# Altium PCB flatsat_2_PCB.PcbDoc (part 5 of 6)
Units mil, origin at the board's own origin, x right, y up, seen from the top; angles counter-clockwise.
Board outline 15748.03 x 9842.52 mil, 4 copper layers (Top Layer, FlatSat GND, FlatSat VCC, Bottom Layer), stack 82.765 mil thick; 155 components, 191 nets, 1391 pads, 1634 vias.
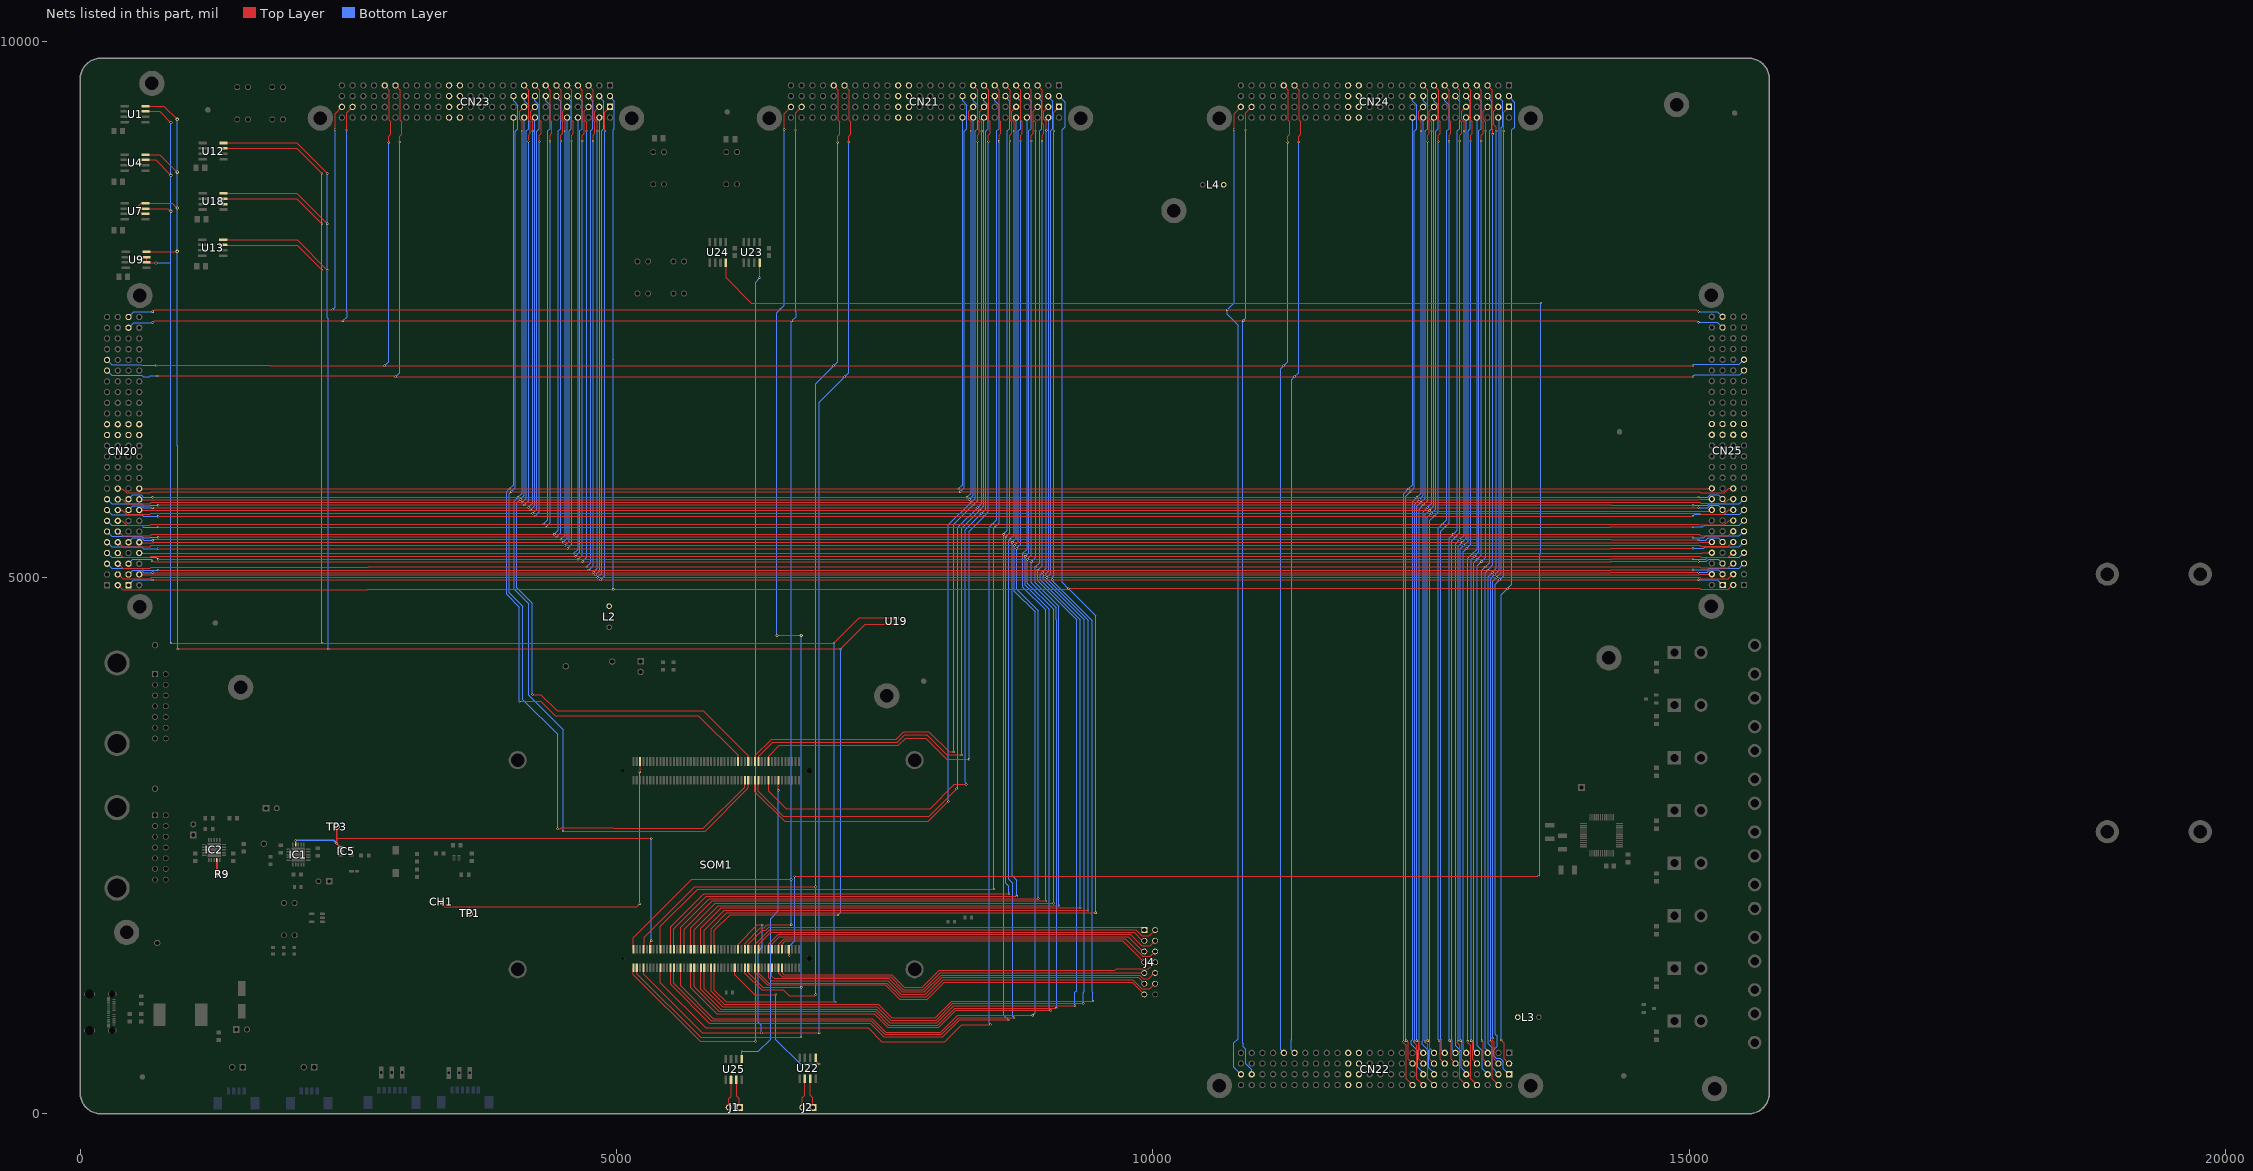
[diagram p6: the nets of this part, all layers, seen from the top]

## Via types
v1: diameter 20, hole 11.81, Top Layer to Bottom Layer, tented both sides, 872 vias
v2: diameter 30, hole 15, Top Layer to Bottom Layer, 690 vias
v3: diameter 30, hole 17.72, Top Layer to Bottom Layer, tented both sides, 72 vias

## Nets (pads, with @x,y where several pads share a name; then routed paths per layer and width w, separated by ;. In a path a pad name is that pad's centre, name@x,y a point inside that pad or via, vN(x,y) a via of type N, cw(c..) or ccw(c..) an arc to the next point about the centre after c; other vN are vias at no path point) (continued)
P32: CN20.72 CN21.72 CN22.72 CN23.72 CN24.72 CN25.72 SOM1.JX1-63 | length 35053.7
  Top Layer w8: CN20.72@551.18,5829.13 554.25,5826.07 v1(4001.13,5826.07) v1(8186.96,5826.07) v1(12381.45,5826.07) 15206,5826.07 CN25.72@15211.23,5831.3 ; v1(4094.49,3846.46) 4295.58,3846.46 4427.96,3714.08 5764.27,3714.08 6133.86,3344.49 SOM1.JX1-63@6133.86,3285.43 ; v1(12336.29,673.63) 12336.11,673.45 12336.11,664.13 12362.12,638.12 12362.12,328.88 CN22.72@12421.59,269.42
  Bottom Layer w8: CN23.72@4040.5,9287.84 4040.5,5865.44 v1(4001.13,5826.07) 3976.38,5801.31 3976.38,4842.52 4094.49,4724.41 v1(4094.49,3846.46) ; v1(8186.96,5826.07) 8226.33,5865.44 CN21.72@8226.33,9287.84 ; v1(12336.29,673.63) 12337.04,674.38 12337.04,5781.66 v1(12381.45,5826.07) 12420.82,5865.44 CN24.72@12420.82,9287.84
P33: CN20.20 CN21.20 CN22.20 CN23.20 CN24.20 CN25.20 SOM1.JX1-68 | length 36984.3
  Top Layer w8: CN20.20@351.18,5829.13 393.86,5829.13 434.39,5788.6 653.68,5788.6 664.58,5799.49 v1(4018.02,5799.49) v1(8203.85,5799.49) v1(12398.34,5799.49) 15099.99,5799.49 15108.72,5790.76 15328.02,5790.76 15368.55,5831.3 CN25.20@15411.23,5831.3 ; v1@4451.74,2660.01 4474.97,2660.01 4483.52,2668.56 4970.38,2668.56 4977.38,2661.55 5811.16,2661.55 6196.85,3047.24 SOM1.JX1-68@6196.85,3112.2 ; v1(12361.83,682.41) 12367.91,682.41 12381.05,669.27 12381.05,549.03 12381.1,548.98 12381.1,511.81 12421.59,471.33 CN22.20@12421.59,469.42
  Top Layer w15: v1(4450.79,2659.05) v1@4451.74,2660.01
  Bottom Layer w8: CN23.20@4040.16,9488.19 4040.16,9445.51 4080.69,9404.98 4080.69,9185.69 4057.39,9162.38 4057.39,5838.86 v1(4018.02,5799.49) 3999.9,5781.37 3999.9,4858.37 4127.26,4731 4127.26,3860.93 4450.79,3537.4 v1(4450.79,2659.05) ; v1(8203.85,5799.49) 8243.22,5838.86 8243.22,9162.38 8266.52,9185.69 8266.52,9404.98 8225.98,9445.51 CN21.20@8225.98,9488.19 ; v1(12361.83,682.41) 12359.54,684.7 12359.54,692.52 12358.97,693.09 12358.97,1417.32 12358.97,5760.12 v1(12398.34,5799.49) 12437.71,5838.86 12437.71,9162.38 12461.01,9185.69 12461.01,9404.98 12420.47,9445.51 CN24.20@12420.47,9488.19
P34: CN20.69 CN21.69 CN22.69 CN23.69 CN24.69 CN25.69 SOM1.JX1-70 | length 36685.2
  Top Layer w8: v1(676.34,5748.58) v1(4081.34,5748.58) v1(8267.17,5748.58) v1(12461.65,5748.58) 15083.91,5748.58 v1(15086.07,5750.74) ; v1(4120.71,9163.03) 4120.71,9249.18 4098.82,9271.07 4098.82,9347.83 CN23.69@4139.17,9388.19 ; v1(4501.97,2637.05) 5826.02,2637.05 6228.34,3039.37 SOM1.JX1-70@6228.34,3112.2 ; v1(8306.54,9163.03) 8306.54,9249.18 8284.65,9271.07 8284.65,9347.83 CN21.69@8325,9388.19 ; v1(12501.02,9163.03) 12501.02,9249.18 12479.13,9271.07 12479.13,9347.83 CN24.69@12519.49,9388.19
  Bottom Layer w8: CN20.69@451.18,5730.12 491.54,5770.47 568.3,5770.47 590.19,5748.58 v1(676.34,5748.58) ; v1(4120.71,9163.03) 4120.71,5787.95 v1(4081.34,5748.58) 4045.6,5712.84 4045.6,4891.41 4181.1,4755.91 4181.1,3901.03 4501.97,3580.16 v1(4501.97,2637.05) ; v1(8267.17,5748.58) 8306.54,5787.95 v1(8306.54,9163.03) ; v1(12501.02,9163.03) 12501.02,5787.95 v1(12461.65,5748.58) 12422.28,5709.21 12422.28,1417.32 12422.28,694.43 12410.5,682.65 12410.5,649.9 12470.47,589.93 12470.47,433.07 12521.59,381.96 CN22.69@12521.59,369.42 ; v1(15086.07,5750.74) 15172.21,5750.74 15194.11,5772.63 15270.87,5772.63 CN25.69@15311.23,5732.28
P35: CN20.70 CN21.70 CN22.70 CN23.70 CN24.70 CN25.70 SOM1.JX1-69 | length 35111.9
  Top Layer w8: CN20.70@551.18,5729.13 552.74,5727.57 v1(4102.35,5727.57) v1(8288.17,5727.57) v1(12482.66,5727.57) 14267.85,5727.57 14269.91,5725.51 15090.55,5725.51 15097.38,5732.34 15210.18,5732.34 CN25.70@15211.23,5731.3 ; CN23.70@4140.16,9288.19 CN23.70@4141.72,9286.63 ; v1(4216.54,3909.45) 4294.83,3909.45 4446.19,3758.09 5808.84,3758.09 6228.35,3338.58 SOM1.JX1-69@6228.35,3285.43 ; CN21.70@8325.98,9288.19 CN21.70@8327.54,9286.63 ; v1(12434.42,676.86) 12436.11,675.17 12436.11,664.13 12462.12,638.12 12462.12,328.88 CN22.70@12521.59,269.42 ; CN24.70@12520.47,9288.19 CN24.70@12522.03,9286.63
  Bottom Layer w8: CN23.70@4140.16,9288.19 4141.72,9286.63 4141.72,5766.94 v1(4102.35,5727.57) 4070.13,5695.35 4070.13,4906.25 4216.54,4759.84 v1(4216.54,3909.45) ; v1(8288.17,5727.57) 8327.54,5766.94 8327.54,9286.63 CN21.70@8325.98,9288.19 ; v1(12434.42,676.86) 12436.71,679.16 12436.71,687.64 12439.84,690.77 12439.84,5684.75 v1(12482.66,5727.57) 12522.03,5766.94 12522.03,9286.63 CN24.70@12520.47,9288.19
P36: CN20.18 CN21.18 CN22.18 CN23.18 CN24.18 CN25.18 SOM1.JX1-74 | length 36847
  Top Layer w8: CN20.18@351.18,5729.13 393.86,5729.13 434.39,5688.6 653.68,5688.6 667.22,5702.13 v1(4119.36,5702.13) v1(8305.19,5702.13) v1(12499.68,5702.13) 15097.36,5702.13 15108.72,5690.76 15328.02,5690.76 15368.55,5731.3 CN25.18@15411.23,5731.3 ; SOM1.JX1-74@6291.34,3112.2 6291.34,3003.94 6568.9,2726.38 7907.48,2726.38 v1(8094.49,2913.39) ; v1(12460.85,682.41) 12461.01,682.25 12467.91,682.25 12478.44,671.72 12478.44,514.47 12521.59,471.33 CN22.18@12521.59,469.42
  Bottom Layer w8: v1(4119.36,5702.13) 4158.73,5741.5 4158.73,9163.73 4180.69,9185.69 4180.69,9404.98 4140.16,9445.51 CN23.18@4140.16,9488.19 ; v1(8094.49,2913.39) 8094.49,5491.43 v1(8305.19,5702.13) 8344.56,5741.5 8344.56,9163.73 8366.52,9185.69 8366.52,9404.98 8325.98,9445.51 CN21.18@8325.98,9488.19 ; v1(12460.85,682.41) 12460.31,682.95 12460.31,1417.32 12460.31,5662.76 v1(12499.68,5702.13) 12539.05,5741.5 12539.05,9163.73 12561.01,9185.69 12561.01,9404.98 12520.47,9445.51 CN24.18@12520.47,9488.19
P37: CN20.67 CN21.67 CN22.67 CN23.67 CN24.67 CN25.67 SOM1.JX1-76 | length 36452.9
  Top Layer w8: v1(676.59,5650.14) 678.88,5652.44 686.69,5652.44 687.27,5653.02 v1(4179.78,5653.02) v1(8365.61,5653.02) v1(12560.09,5653.02) 12563.34,5653.02 12567.5,5648.86 15075.14,5648.86 15076.28,5650.01 15083.53,5650.01 v1(15085.82,5652.3) ; v1(4219.15,9162.78) 4219.15,9250.74 4198.82,9271.07 4198.82,9346.85 CN23.67@4240.16,9388.19 ; SOM1.JX1-76@6322.83,3112.2 6322.83,3007.88 6555.12,2775.59 7914.08,2775.59 v1(8169.98,3031.5) ; v1(8404.98,9162.78) 8404.98,9250.74 8384.65,9271.07 8384.65,9346.85 CN21.67@8425.98,9388.19 ; v1(12599.46,9162.78) 12599.46,9250.74 12579.13,9271.07 12579.13,9346.85 CN24.67@12620.47,9388.19
  Bottom Layer w8: CN20.67@451.18,5629.13 492.52,5670.47 568.3,5670.47 588.63,5650.14 v1(676.59,5650.14) ; v1(4179.78,5653.02) 4219.15,5692.39 v1(4219.15,9162.78) ; v1(8169.98,3031.5) 8181.1,3042.62 8181.1,5468.52 v1(8365.61,5653.02) 8404.98,5692.39 v1(8404.98,9162.78) ; v1(12599.46,9162.78) 12599.46,5692.39 v1(12560.09,5653.02) 12521.18,5614.1 12521.18,688.22 12510.5,677.55 12510.5,649.9 12573.35,587.06 12573.35,431.15 12621.59,382.91 CN22.67@12621.59,369.42 ; v1(15085.82,5652.3) 15173.77,5652.3 15194.11,5672.63 15269.89,5672.63 CN25.67@15311.23,5631.3
P38: CN20.68 CN21.68 CN22.68 CN23.68 CN24.68 CN25.68 SOM1.JX1-75 | length 35561.8
  Top Layer w8: CN20.68@551.18,5629.13 v1(4200.79,5629.13) v1(8386.61,5629.13) 8387.25,5628.49 12580.46,5628.49 v1(12581.1,5627.85) 12584.01,5627.85 12591.79,5620.08 15181.01,5620.08 15182.46,5621.53 15201.46,5621.53 CN25.68@15211.23,5631.3 ; SOM1.JX1-75@6322.83,3285.43 6324.87,3287.47 6324.87,3332.75 6456.69,3464.57 7618.11,3464.57 7687.01,3533.46 7893.7,3533.46 8080.71,3346.46 v1(8218.5,3346.46) ; v1(12536.88,674.27) 12562.12,649.03 12562.12,328.88 CN22.68@12621.59,269.42
  Bottom Layer w8: v1(4200.79,5629.13) 4240.16,5668.5 CN23.68@4240.16,9288.19 ; v1(8218.5,3346.46) 8218.5,5461.02 v1(8386.61,5629.13) 8425.98,5668.5 CN21.68@8425.98,9288.19 ; v1(12536.88,674.27) 12536.88,679.32 12541.73,684.17 12541.73,1417.32 12541.73,5589.76 12579.82,5627.85 v1(12581.1,5627.85) ; v1@12581.1,5629.13 12620.47,5668.5 CN24.68@12620.47,9288.19
P39: CN20.16 CN21.16 CN22.16 CN23.16 CN24.16 CN25.16 SOM1.JX1-82 | length 36776.2
  Top Layer w8: CN20.16@351.18,5629.13 393.86,5629.13 434.39,5588.6 653.68,5588.6 664.58,5599.49 v1(4217.45,5599.49) v1(8403.28,5599.49) 8403.49,5599.28 12597.56,5599.28 v1(12597.77,5599.07) ; SOM1.JX1-82@6417.32,3112.2 6417.32,3007.88 6580.71,2844.49 7923.23,2844.49 8150.79,3072.05 v1(8261.12,3072.05) ; v1(12562.66,682.33) 12567.98,682.33 12581.05,669.27 12581.05,549.03 12581.1,548.98 12581.1,511.81 12621.59,471.33 CN22.16@12621.59,469.42 ; v1@12597.77,5599.49 15099.99,5599.49 15108.72,5590.76 15328.02,5590.76 15368.55,5631.3 CN25.16@15411.23,5631.3
  Bottom Layer w8: v1(4217.45,5599.49) 4256.82,5638.86 4256.82,9161.81 4280.69,9185.69 4280.69,9404.98 4240.16,9445.51 CN23.16@4240.16,9488.19 ; 8261.12,3085.15 8251.97,3094.31 8251.97,5448.18 v1(8403.28,5599.49) 8442.65,5638.86 8442.65,9161.81 8466.52,9185.69 8466.52,9404.98 8425.98,9445.51 CN21.16@8425.98,9488.19 ; v1(12562.66,682.33) 12560.82,684.17 12560.82,691.33 12559.06,693.09 12559.06,5560.78 12597.35,5599.07 v1(12597.77,5599.07) ; v1@12597.56,5599.28 12637.14,5638.86 12637.14,9161.81 12661.01,9185.69 12661.01,9404.98 12620.47,9445.51 CN24.16@12620.47,9488.19
  Bottom Layer w11: v1(8261.12,3072.05) 8261.12,3085.15
P40: CN20.15 CN21.15 CN22.15 CN23.15 CN24.15 CN25.15 SOM1.JX1-81 | length 36930.5
  Top Layer w8: v1(727.5,5572.19) 728.21,5572.9 737.57,5572.9 738.18,5573.51 v1(4241.9,5573.51) v1(8427.72,5573.51) v1(12622.21,5573.51) 12622.26,5573.47 15034.21,5573.47 v1(15034.91,5572.77) ; CN23.15@4240.16,9588.19 4283.07,9545.28 4283.07,9264.54 4298.69,9248.93 4298.69,9140.06 4281.27,9122.64 v1(4281.27,9066.54) ; SOM1.JX1-81@6417.32,3285.43 6417.32,3336.61 6515.75,3435.04 7627.95,3435.04 7696.85,3503.94 7883.86,3503.94 8080.71,3307.09 v1(8287.4,3307.09) ; CN21.15@8425.98,9588.19 8468.9,9545.28 8468.9,9264.54 8484.51,9248.93 8484.51,9140.06 8467.09,9122.64 v1(8467.09,9066.54) ; CN24.15@12620.47,9588.19 12663.39,9545.28 12663.39,9264.54 12679,9248.93 12679,9140.06 12661.58,9122.64 v1(12661.58,9066.54)
  Bottom Layer w8: CN20.15@251.18,5629.13 294.09,5586.22 574.83,5586.22 590.44,5570.61 725.91,5570.61 v1(727.5,5572.19) ; v1(4241.9,5573.51) 4281.27,5612.88 v1(4281.27,9066.54) ; v1(8287.4,3307.09) 8287.4,5433.19 v1(8427.72,5573.51) 8467.09,5612.88 v1(8467.09,9066.54) ; CN22.15@12621.59,569.42 12621.59,575.2 12583.67,613.12 12583.67,691.04 12582.84,691.86 12582.84,1417.32 12582.84,5534.14 v1(12622.21,5573.51) 12661.58,5612.88 v1(12661.58,9066.54) ; v1(15034.91,5572.77) 15052.7,5590.55 15470.48,5590.55 CN25.15@15511.23,5631.3
P41: CN20.14 CN21.14 CN22.14 CN23.14 CN24.14 CN25.14 SOM1.JX2-18 | length 40457.9
  Top Layer w8: CN20.14@351.18,5529.13 393.86,5529.13 434.39,5488.6 653.68,5488.6 664.58,5499.49 v1(4319.18,5499.49) v1(8505.01,5499.49) v1(12699.49,5499.49) 15091.06,5499.49 15099.79,5490.76 15328.02,5490.76 15368.55,5531.3 CN25.14@15411.23,5531.3 ; SOM1.JX2-18@5409.45,1362.2 5409.45,1224.41 5832.34,801.52 7348.09,801.52 7474.69,674.92 8060.81,674.92 8218.29,832.4 v1(8486.91,832.4) ; v1(12667.91,682.41) 12681.05,669.27 12681.05,549.03 12681.1,548.98 12681.1,511.81 12721.59,471.33 CN22.14@12721.59,469.42
  Bottom Layer w8: v1(4319.18,5499.49) 4358.55,5538.86 4358.55,9163.54 4380.69,9185.69 4380.69,9404.98 4340.16,9445.51 CN23.14@4340.16,9488.19 ; v1(8486.91,832.4) 8486.91,832.55 8476.38,843.09 8476.38,5470.86 v1(8505.01,5499.49) 8544.38,5538.86 8544.38,9163.54 8566.52,9185.69 8566.52,9404.98 8525.98,9445.51 CN21.14@8525.98,9488.19 ; v1(12667.91,682.41) 12660.12,690.2 12660.12,1417.32 12660.12,5460.12 v1(12699.49,5499.49) 12738.86,5538.86 12738.86,9163.54 12761.01,9185.69 12761.01,9404.98 12720.47,9445.51 CN24.14@12720.47,9488.19
P42: CN20.13 CN21.13 CN22.13 CN23.13 CN24.13 CN25.13 SOM1.JX2-17 | length 39583.7
  Top Layer w8: v1(727.5,5470.61) v1(4341.9,5470.61) v1(8527.72,5470.61) v1(12722.21,5470.61) 14267.85,5470.61 14270.01,5472.77 v1(15034.91,5472.77) v1@15032.75,5470.61 ; CN23.13@4340.16,9588.19 4383.07,9545.28 4383.07,9264.54 4398.69,9248.93 4398.69,9141.48 4381.27,9124.06 v1(4381.27,9067.96) ; SOM1.JX2-17@5409.45,1535.43 5409.45,1748.03 5757.54,2096.12 v1(8518.36,2096.12) ; CN21.13@8525.98,9588.19 8568.9,9545.28 8568.9,9264.54 8584.51,9248.93 8584.51,9141.48 8567.09,9124.06 v1(8567.09,9067.96) ; CN24.13@12720.47,9588.19 12763.39,9545.28 12763.39,9264.54 12779,9248.93 12779,9141.48 12761.58,9124.06 v1(12761.58,9067.96)
  Bottom Layer w8: CN20.13@251.18,5529.13 294.09,5486.22 574.83,5486.22 590.44,5470.61 v1(727.5,5470.61) ; v1(4341.9,5470.61) 4381.27,5509.98 v1(4381.27,9067.96) ; v1(8518.36,2096.12) 8518.36,5459.92 8527.72,5469.28 v1(8527.72,5470.61) 8567.09,5509.98 v1(8567.09,9067.96) ; CN22.13@12721.59,569.42 12690.75,600.26 12690.75,691.2 12685.83,696.12 12685.83,1417.32 12685.83,5434.23 v1(12722.21,5470.61) 12761.58,5509.98 v1(12761.58,9067.96) ; v1(15034.91,5472.77) 15128.28,5472.77 15143.89,5488.38 15468.31,5488.38 CN25.13@15511.23,5531.3
P43: CN20.12 CN21.12 CN22.12 CN23.12 CN24.12 CN25.12 SOM1.JX2-24 | length 40544.3
  Top Layer w8: CN20.12@351.18,5429.13 358.27,5429.13 398.8,5388.6 653.68,5388.6 668.58,5403.49 v1(4419.48,5403.49) v1(8609.91,5403.49) v1(12799.79,5403.49) 15095.99,5403.49 15108.72,5390.76 15363.61,5390.76 CN25.12@15404.14,5431.3 ; SOM1.JX2-24@5503.94,1362.2 5503.93,1208.66 5867.07,845.53 7366.32,845.53 7492.92,718.94 8042.57,718.94 8200.05,876.42 v1(8654.82,876.42) ; v1(12767.91,682.41) 12781.05,669.27 12781.05,549.03 12781.1,548.98 12781.1,511.81 12821.59,471.33 CN22.12@12821.59,469.42
  Bottom Layer w8: v1(4419.48,5403.49) 4458.85,5442.86 4458.85,9163.84 4480.69,9185.69 4480.69,9440.57 CN23.12@4440.16,9481.1 ; v1@8607.61,5405.79 8644.67,5442.86 8644.67,9163.84 8666.52,9185.69 8666.52,9440.57 CN21.12@8625.98,9481.1 ; v1(8609.91,5403.49) 8609.91,921.33 v1(8654.82,876.42) ; v1(12767.91,682.41) 12764.73,685.59 12764.73,1417.32 12764.73,5368.43 v1(12799.79,5403.49) 12839.16,5442.86 12839.16,9163.84 12861.01,9185.69 12861.01,9440.57 CN24.12@12820.47,9481.1
P44: CN20.11 CN21.11 CN22.11 CN23.11 CN24.11 CN25.11 SOM1.JX2-23 | length 39749.9
  Top Layer w8: v1(727.5,5376.56) 729.5,5378.56 v1(4441.9,5378.56) 15029.12,5378.56 v1(15034.91,5372.77) ; CN23.11@4440.16,9588.19 4483.07,9545.28 4483.07,9264.54 4498.69,9248.93 4498.69,9142.38 4481.27,9124.96 v1(4481.27,9068.86) ; SOM1.JX2-23@5503.94,1535.43 5503.94,1744.09 5811.95,2052.11 v1(8658.65,2052.11) ; CN21.11@8625.98,9588.19 8668.9,9545.28 8668.9,9264.54 8684.51,9248.93 8684.51,9142.38 8667.09,9124.96 v1(8667.09,9068.86) ; CN24.11@12820.47,9588.19 12863.39,9545.28 12863.39,9264.54 12879,9248.93 12879,9142.38 12861.58,9124.96 v1(12861.58,9068.86)
  Bottom Layer w8: CN20.11@251.18,5429.13 294.09,5386.22 574.83,5386.22 590.44,5370.61 654.37,5370.61 660.32,5376.56 v1(727.5,5376.56) ; v1(4441.9,5378.56) 4481.27,5417.93 v1(4481.27,9068.86) ; v1@8629.32,5380.16 8667.09,5417.93 v1(8667.09,9068.86) ; v1(8630.92,5378.56) 8630.92,2152.54 8658.65,2124.81 v1(8658.65,2052.11) ; CN22.11@12821.59,569.42 12790.75,600.26 12790.75,691.2 12788.4,693.55 12788.4,1417.32 12788.4,5344.75 v1(12822.21,5378.56) 12861.58,5417.93 v1(12861.58,9068.86) ; v1(15034.91,5372.77) 15136.55,5372.77 15152.16,5388.38 15468.31,5388.38 CN25.11@15511.23,5431.3
P45: CN20.61 CN21.61 CN22.61 CN23.61 CN24.61 CN25.61 SOM1.JX2-26 | length 40248.7
  Top Layer w8: v1(676.59,5347.84) 679.57,5347.84 687.27,5355.55 v1(4482.08,5355.55) v1(8667.9,5355.55) v1(12862.39,5355.55) 14267.85,5355.55 14271.64,5351.76 15081.07,5351.76 15082.68,5350.14 v1(15085.82,5350.14) ; v1(4521.45,9162.78) 4521.45,9248.44 4498.82,9271.07 4498.82,9347.05 CN23.61@4540.16,9388.39 ; SOM1.JX2-26@5535.43,1362.2 5535.43,1216.54 5884.43,867.54 7375.44,867.54 7502.03,740.94 8033.46,740.94 8190.94,898.42 v1(8706,898.42) ; v1(8707.27,9162.78) 8707.27,9248.44 8684.65,9271.07 8684.65,9347.05 CN21.61@8725.98,9388.39 ; v1(12901.76,9162.78) 12901.76,9248.44 12879.13,9271.07 12879.13,9347.05 CN24.61@12920.47,9388.39
  Bottom Layer w8: CN20.61@450.98,5329.13 492.32,5370.47 568.3,5370.47 590.93,5347.84 v1(676.59,5347.84) ; v1(4482.08,5355.55) 4521.45,5394.92 v1(4521.45,9162.78) ; v1(8706,898.42) 8706,898.53 8695.42,909.11 8695.42,2151.04 8657.48,2188.98 8657.48,5341.88 8667.9,5352.3 v1(8667.9,5355.55) 8707.27,5394.92 v1(8707.27,9162.78) ; v1(12901.76,9162.78) 12901.76,5394.92 v1(12862.39,5355.55) 12823.32,5316.48 12823.32,637.08 12874.02,586.39 12874.02,430.67 12921.59,383.1 CN22.61@12921.59,369.61 ; v1(15085.82,5350.14) 15085.96,5350 15153.15,5350 15175.78,5372.63 15270.09,5372.63 CN25.61@15311.42,5331.3
P46: CN20.62 CN21.62 CN22.62 CN23.62 CN24.62 CN25.62 SOM1.JX2-25 | length 38531.3
  Top Layer w8: CN20.62@551.18,5329.13 553.48,5326.84 685.29,5326.84 687.59,5329.13 v1(4503.09,5329.13) v1(8688.91,5329.13) v1(12883.4,5329.13) 12886.65,5329.13 12892.39,5323.39 15088.92,5323.39 15096.99,5331.46 15211.06,5331.46 CN25.62@15211.23,5331.3 ; SOM1.JX2-25@5535.43,1535.43 5535.43,1726.38 5839.15,2030.1 v1(8731.59,2030.1) ; v1(12844.33,678.55) 12844.33,675.3 12836.11,667.08 12836.11,664.13 12862.12,638.12 12862.12,328.88 CN22.62@12921.59,269.42
  Bottom Layer w8: v1(4503.09,5329.13) 4542.46,5368.5 CN23.62@4542.46,9285.89 ; CN21.62@8728.28,9285.89 8728.28,5368.5 v1(8688.91,5329.13) 8688.91,2220.54 8731.59,2177.86 v1(8731.59,2030.1) ; v1(12844.33,678.55) 12845.05,679.27 12845.05,5290.78 v1(12883.4,5329.13) 12922.77,5368.5 CN24.62@12922.77,9285.89
P47: CN20.10 CN21.10 CN22.10 CN23.10 CN24.10 CN25.10 SOM1.JX2-30 | length 40785.8
  Top Layer w8: CN20.10@358.27,5329.13 398.8,5288.6 653.68,5288.6 664.58,5299.49 v1(4518.92,5299.49) v1(8709.92,5299.49) v1(12899.24,5299.49) 15099.99,5299.49 15108.72,5290.76 15363.61,5290.76 CN25.10@15404.14,5331.3 ; SOM1.JX2-30@5598.42,1362.2 5598.42,1192.92 5901.79,889.55 7384.55,889.55 7511.15,762.95 8024.34,762.95 8181.82,920.43 v1(8880.61,920.43) ; v1(12870.98,682.91) 12870.98,679.34 12881.05,669.27 12881.05,549.03 12881.1,548.98 12881.1,511.81 12921.59,471.33 CN22.10@12921.59,469.42
  Bottom Layer w8: v1(4518.92,5299.49) 4558.29,5338.86 4558.29,9163.28 4580.69,9185.69 4580.69,9440.57 CN23.10@4540.16,9481.1 ; CN21.10@8725.98,9481.1 8766.52,9440.57 8766.52,9185.69 8744.12,9163.28 8744.12,5338.86 8744.12,5333.69 v1(8709.92,5299.49) 8709.92,4872.76 8901.57,4681.1 8901.57,941.4 v1(8880.61,920.43) ; v1(12870.98,682.91) 12866.45,687.44 12866.45,1417.32 12866.45,5266.7 v1(12899.24,5299.49) 12938.61,5338.86 12938.61,9163.28 12961.01,9185.69 12961.01,9440.57 CN24.10@12920.47,9481.1
P48: CN20.9 CN21.9 CN22.9 CN23.9 CN24.9 CN25.9 SOM1.JX2-29 | length 40125.2
  Top Layer w8: v1(727.5,5270.61) v1(4541.9,5270.61) v1(8730.93,5270.61) v1(12922.21,5270.61) 14267.85,5270.61 14271.33,5274.08 15030.11,5274.08 15031.19,5273 v1(15034.91,5273) ; CN23.9@4540.16,9588.19 4583.07,9545.28 4583.07,9264.54 4598.69,9248.93 4598.69,9142.38 4581.27,9124.96 v1(4581.27,9068.86) ; SOM1.JX2-29@5598.43,1535.43 5598.43,1740.16 5866.36,2008.09 v1(8931.79,2008.09) ; CN21.9@8725.98,9588.19 8768.9,9545.28 8768.9,9264.54 8784.51,9248.93 8784.51,9142.38 8767.09,9124.96 v1(8767.09,9068.86) ; CN24.9@12920.47,9588.19 12963.39,9545.28 12963.39,9264.54 12979,9248.93 12979,9142.38 12961.58,9124.96 v1(12961.58,9068.86)
  Bottom Layer w8: CN20.9@251.18,5329.13 294.09,5286.22 574.83,5286.22 590.44,5270.61 v1(727.5,5270.61) ; v1(4541.9,5270.61) 4581.27,5309.98 v1(4581.27,9068.86) ; v1(8767.09,9068.86) 8767.09,5309.98 8730.93,5273.81 v1(8730.93,5270.61) 8730.93,4891.12 8931.79,4690.25 v1(8931.79,2008.09) ; CN22.9@12921.59,569.42 12893,598.01 12893,5241.39 v1(12922.21,5270.61) 12961.58,5309.98 v1(12961.58,9068.86) ; v1(15034.91,5273) 15035.15,5272.77 15134.97,5272.77 15150.59,5288.38 15468.31,5288.38 CN25.9@15511.23,5331.3
P49: CN20.60 CN21.60 CN22.60 CN23.60 CN24.60 CN25.60 SOM1.JX2-31 | length 38899.2
  Top Layer w8: CN20.60@551.18,5229.13 554.16,5226.15 v1(4603.77,5226.15) v1(8789.6,5226.15) v1(12984.08,5226.15) 15117.88,5226.15 15122.34,5230.61 15210.54,5230.61 CN25.60@15211.23,5231.3 ; SOM1.JX2-31@5629.92,1535.43 5629.92,1722.44 5893.56,1986.08 v1(9002.95,1986.08) ; v1(12936.11,678.55) 12936.11,664.13 12962.12,638.12 12962.12,328.88 CN22.60@13021.59,269.42
  Bottom Layer w8: v1(4603.77,5226.15) 4643.14,5265.52 CN23.60@4643.14,9285.21 ; CN21.60@8828.97,9285.21 8828.97,5265.52 v1(8789.6,5226.15) 8789.6,4911.19 9002.95,4697.83 v1(9002.95,1986.08) ; v1(12936.11,678.55) 12936.11,5178.18 v1(12984.08,5226.15) 13023.45,5265.52 CN24.60@13023.45,9285.21
P50: CN20.8 CN21.8 CN22.8 CN23.8 CN24.8 CN25.8 SOM1.JX2-36 | length 40914.3
  Top Layer w8: CN20.8@358.27,5229.13 398.8,5188.6 653.68,5188.6 664.58,5199.49 v1(4619.36,5199.49) v1(8810.6,5199.49) v1(12999.68,5199.49) 15099.99,5199.49 15108.72,5190.76 15363.61,5190.76 CN25.8@15404.14,5231.3 ; SOM1.JX2-36@5692.91,1362.2 5692.91,1177.17 5936.52,933.56 7402.79,933.56 7529.38,806.97 8006.11,806.97 8163.59,964.45 v1(9048.52,964.45) ; v1(12968.81,681.65) 12968.81,681.51 12981.05,669.27 12981.05,549.03 12981.1,548.98 12981.1,511.81 13021.59,471.33 CN22.8@13021.59,469.42
  Bottom Layer w8: v1(4619.36,5199.49) 4658.73,5238.86 4658.73,9163.73 4680.69,9185.69 4680.69,9440.57 CN23.8@4640.16,9481.1 ; CN21.8@8825.98,9481.1 8866.52,9440.57 8866.52,9185.69 8844.56,9163.73 8844.56,5238.86 8844.56,5233.45 v1(8810.6,5199.49) 8810.6,4929.55 9035.43,4704.72 9035.43,977.54 v1(9048.52,964.45) ; v1(12968.81,681.65) 12968.81,5168.62 v1(12999.68,5199.49) 13039.05,5238.86 13039.05,9163.73 13061.01,9185.69 13061.01,9440.57 CN24.8@13020.47,9481.1
P51: CN20.7 CN21.7 CN22.7 CN23.7 CN24.7 CN25.7 SOM1.JX2-35 | length 40314.4
  Top Layer w8: v1(727.5,5170.61) v1(4641.9,5170.61) v1(8831.61,5170.61) v1(13022.21,5170.61) 14267.85,5170.61 14271.2,5173.96 15034.46,5173.96 v1(15034.91,5174.41) ; CN23.7@4640.16,9588.19 4683.07,9545.28 4683.07,9262.9 4698.69,9247.28 4698.69,9142.38 4681.27,9124.96 v1(4681.27,9068.86) ; SOM1.JX2-35@5692.91,1535.43 5692.91,1736.22 5920.77,1964.08 v1(9074.11,1964.08) ; CN21.7@8825.98,9588.19 8868.9,9545.28 8868.9,9263.78 8884.51,9248.17 8884.51,9142.38 8867.09,9124.96 v1(8867.09,9068.86) ; CN24.7@13020.47,9588.19 13063.39,9545.28 13063.39,9265.21 13079,9249.59 13079,9142.38 13061.58,9124.96 v1(13061.58,9068.86)
  Bottom Layer w8: CN20.7@251.18,5229.13 292.65,5187.67 710.44,5187.67 v1(727.5,5170.61) ; v1(4641.9,5170.61) 4681.27,5209.98 v1(4681.27,9068.86) ; v1(8867.09,9068.86) 8867.09,5209.98 8867.09,5206.09 v1(8831.61,5170.61) 8831.61,4947.92 9074.11,4705.41 v1(9074.11,1964.08) ; CN22.7@13021.59,569.42 12992.13,598.88 12992.13,5140.52 v1(13022.21,5170.61) 13061.58,5209.98 v1(13061.58,9068.86) ; v1(15034.91,5174.41) 15036.56,5172.77 15153.08,5172.77 15168.7,5188.38 15468.31,5188.38 CN25.7@15511.23,5231.3
P52: CN20.6 CN21.6 CN22.6 CN23.6 CN24.6 CN25.6 SOM1.JX2-37 | length 39951.3
  Top Layer w8: CN20.6@358.27,5129.13 398.8,5088.6 653.68,5088.6 661.95,5096.87 2687.53,5096.87 2690.16,5099.49 v1(4718.98,5099.49) v1(8904.81,5099.49) v1(13099.3,5099.49) 15099.99,5099.49 15108.72,5090.76 15363.61,5090.76 CN25.6@15404.14,5131.3 ; SOM1.JX2-37@5724.41,1535.43 5724.41,1718.5 5947.97,1942.07 v1(9125.29,1942.07) ; v1(13067.91,682.41) 13081.05,669.27 13081.05,549.03 13081.1,548.98 13081.1,511.81 13121.59,471.33 CN22.6@13121.59,469.42
  Bottom Layer w8: v1(4718.98,5099.49) 4758.35,5138.86 4758.35,9163.34 4780.69,9185.69 4780.69,9440.57 CN23.6@4740.16,9481.1 ; CN21.6@8925.98,9481.1 8966.52,9440.57 8966.52,9185.69 8944.18,9163.34 8944.18,5138.86 v1(8904.81,5099.49) 8904.81,4953.46 9125.29,4732.97 v1(9125.29,1942.07) ; v1(13067.91,682.41) 13066.48,683.84 13066.48,1417.32 13066.48,5066.67 v1(13099.3,5099.49) 13138.67,5138.86 13138.67,9163.34 13161.01,9185.69 13161.01,9440.57 CN24.6@13120.47,9481.1
P53: CN20.5 CN21.5 CN22.5 CN23.5 CN24.5 CN25.5 SOM1.JX2-42 | length 41621.5
  Top Layer w8: v1(727.5,5070.61) v1(4741.9,5070.61) v1(8927.72,5070.61) v1(13122.21,5070.61) 14267.85,5070.61 14272.19,5074.95 15032.74,5074.95 v1(15034.91,5072.77) ; CN23.5@4740.16,9588.19 4783.07,9545.28 4783.07,9264.54 4798.69,9248.93 4798.69,9142.98 4781.27,9125.56 v1(4781.27,9069.46) ; SOM1.JX2-42@5787.4,1362.2 5787.4,1161.42 5971.24,977.58 7421.02,977.58 7547.61,850.98 7987.88,850.98 8145.36,1008.46 v1(9274.31,1008.46) ; CN21.5@8925.98,9588.19 8968.9,9545.28 8968.9,9235.81 8984.51,9220.2 8984.51,9142.98 8967.09,9125.56 v1(8967.09,9069.46) ; CN24.5@13120.47,9588.19 13120.47,9586.76 13164.93,9542.31 13164.93,9177.59 13169.29,9173.23 v1(13169.29,9133.86)
  Bottom Layer w8: CN20.5@251.18,5129.13 294.09,5086.22 574.83,5086.22 590.44,5070.61 v1(727.5,5070.61) ; v1(4741.9,5070.61) 4781.27,5109.98 v1(4781.27,9069.46) ; v1(8967.09,9069.46) 8967.09,5109.98 v1(8927.72,5070.61) 8927.72,4969.91 9291.34,4606.3 9291.34,1149.61 9274.31,1132.58 v1(9274.31,1008.46) ; CN22.5@13121.59,569.42 13111.82,579.19 13111.82,598.05 13098.04,611.83 13098.04,5046.44 v1(13122.21,5070.61) 13169.29,5117.69 v1(13169.29,9133.86) ; v1(15034.91,5072.77) 15171.97,5072.77 15187.58,5088.38 15468.31,5088.38 CN25.5@15511.23,5131.3
P54: CN20.55 CN21.55 CN22.55 CN23.55 CN24.55 CN25.55 SOM1.JX2-41 | length 39905.7
  Top Layer w8: v1(676.59,5046.54) v1(4783.38,5046.54) v1(8969.21,5046.54) v1(13163.69,5046.54) 14267.85,5046.54 14272.22,5050.91 15083.61,5050.91 v1(15085.82,5048.7) ; v1(4822.75,9162.78) 4822.75,9247.14 4798.82,9271.07 4798.82,9346.85 CN23.55@4840.16,9388.19 ; SOM1.JX2-41@5787.4,1535.43 5787.4,1732.28 5975.18,1920.06 v1(9325.49,1920.06) ; v1(9008.58,9170.74) 9008.58,9247.14 8984.65,9271.07 8984.65,9346.85 CN21.55@9025.98,9388.19 ; v1(13203.06,9162.78) 13203.06,9198.51 13179.94,9221.64 13179.94,9346.23 13220.47,9386.76 CN24.55@13220.47,9388.19
  Bottom Layer w8: CN20.55@451.18,5029.13 492.52,5070.47 568.3,5070.47 592.23,5046.54 v1(676.59,5046.54) ; v1(4783.38,5046.54) 4822.75,5085.91 v1(4822.75,9162.78) ; v1(9008.58,9170.74) 9008.58,5085.91 v1(8969.21,5046.54) 8951.34,5028.67 8951.34,4981.73 9325.49,4607.58 v1(9325.49,1920.06) ; v1(13203.06,9162.78) 13203.06,5085.91 v1(13163.69,5046.54) 13125.24,5008.09 13125.24,652.2 13162.12,615.32 13162.12,428.88 CN22.55@13221.59,369.42 ; v1(15085.82,5048.7) 15170.17,5048.7 15194.11,5072.63 15269.89,5072.63 CN25.55@15311.23,5031.3
P55: CN20.56 CN21.56 CN22.56 CN23.56 CN24.56 CN25.56 SOM1.JX2-44 | length 40378.1
  Top Layer w8: CN20.56@551.18,5029.13 554.78,5025.53 v1(4804.39,5025.53) v1(8990.21,5025.53) v1(13184.7,5025.53) 15092.36,5025.53 15097.18,5030.35 15210.28,5030.35 CN25.56@15211.23,5031.3 ; SOM1.JX2-44@5818.9,1362.2 5818.89,1169.29 5988.6,999.59 7430.13,999.59 7556.73,872.99 7978.76,872.99 8136.24,1030.47 v1(9351.08,1030.47) ; v1(13146.25,678.55) 13162.12,662.68 13162.12,328.88 CN22.56@13221.59,269.42
  Bottom Layer w8: v1(4804.39,5025.53) 4843.76,5064.9 CN23.56@4843.76,9284.59 ; CN21.56@9029.58,9284.59 9029.58,5064.9 v1(8990.21,5025.53) 8978.91,5014.23 8978.91,4989.6 9362.2,4606.3 9362.2,1141.73 9351.08,1130.61 v1(9351.08,1030.47) ; v1(13146.25,678.55) 13148.28,680.58 13148.28,4989.12 v1(13184.7,5025.53) 13228.35,5069.18 13228.35,9280.32 CN24.56@13220.47,9288.19
P56: CN20.4 CN21.4 CN22.4 CN23.4 CN24.4 CN25.4 SOM1.JX2-43 | length 40315.1
  Top Layer w8: CN20.4@358.27,5029.13 398.8,4988.6 653.68,4988.6 666.27,5001.19 v1(4822.09,5001.19) v1(9011.22,5001.19) v1(13202.41,5001.19) 15098.3,5001.19 15108.72,4990.76 15363.61,4990.76 CN25.4@15404.14,5031.3 ; SOM1.JX2-43@5818.9,1535.43 5818.9,1714.57 6002.38,1898.05 v1(9396.65,1898.05) ; v1(13169.29,708.66) 13169.29,683.39 13181.05,671.63 13181.05,549.03 13181.1,548.98 13181.1,511.81 13221.59,471.33 CN22.4@13221.59,469.42
  Bottom Layer w8: v1(4822.09,5001.19) 4861.46,5040.56 4861.46,9166.45 4880.69,9185.69 4880.69,9440.57 CN23.4@4840.16,9481.1 ; CN21.4@9025.98,9481.1 9066.52,9440.57 9066.52,9185.69 9047.29,9166.45 9047.29,5040.56 9047.29,5037.25 v1(9011.22,5001.19) 9012.57,4999.83 9012.57,4987.43 9396.65,4603.35 v1(9396.65,1898.05) ; v1(13169.29,708.66) 13167.19,710.76 13167.19,1417.32 13167.19,4965.97 v1(13202.41,5001.19) 13248.03,5046.81 13248.03,9192.91 13261.01,9205.89 13261.01,9440.57 CN24.4@13220.47,9481.1
P57: CN20.53 CN21.53 CN22.53 CN23.53 CN24.53 CN25.53 SOM1.JX2-48 | length 40988.5
  Top Layer w8: v1(676.84,4977.84) 4850.75,4977.84 v1(4852.09,4979.17) 4852.59,4979.67 v1@9064.37,4979.67 ; v1(4891.46,9162.53) 4891.46,9339.68 CN23.53@4940.16,9388.39 ; SOM1.JX2-48@5881.89,1362.2 5881.89,1145.67 6005.97,1021.59 7439.25,1021.59 7565.85,895 7969.65,895 8127.13,1052.48 v1(9442.22,1052.48) ; v1(9064.87,4980.18) v1@9064.37,4979.67 ; v1(9077.28,9162.53) 9077.28,9339.68 CN21.53@9125.98,9388.39 ; v1(13271.77,9162.53) 13271.77,9339.68 CN24.53@13320.47,9388.39 ; v1(15085.57,4980) 14159.11,4980 14157.47,4981.64 13698.94,4981.64 13696.47,4979.17 v1(13232.4,4979.17) 13231.89,4979.67 v1@9064.37,4979.67
  Bottom Layer w8: CN20.53@450.98,4929.13 499.69,4977.84 v1(676.84,4977.84) ; v1(4852.09,4979.17) 4853.42,4979.17 4891.45,5017.21 v1(4891.46,9162.53) ; v1@9062.25,4980.49 9062.25,5002.18 9077.28,5017.21 v1(9077.28,9162.53) ; v1(9064.87,4980.18) 9066.72,4978.33 9066.72,4964.78 9433.07,4598.43 9433.07,1145.67 9442.22,1136.52 v1(9442.22,1052.48) ; v1(13232.4,4979.17) v1@13232.4,4977.84 ; v1(13271.77,9162.53) 13271.77,5017.21 v1@13232.4,4977.84 ; CN22.53@13321.59,369.61 13267.72,423.48 13267.72,492.13 13240.42,519.42 13201.05,519.42 13179.13,541.34 13179.13,600.39 13208.66,629.92 13208.66,728.35 13193.03,743.98 13193.03,1417.32 13193.03,4938.47 v1@13232.4,4977.84 ; v1(15085.57,4980) 15262.72,4980 CN25.53@15311.42,4931.3
P58: CN20.2 CN21.2 CN22.2 CN23.2 CN24.2 CN25.2 SOM1.JX2-47 | length 40449.4
  Top Layer w8: CN20.2@358.27,4929.13 398.81,4888.6 2676.53,4888.6 2679.66,4891.73 v1(4970.47,4891.73) 9200.43,4891.73 9208.19,4899.49 v1(9211.43,4899.49) v1(13308.77,4899.49) 15099.99,4899.49 15108.72,4890.76 15363.61,4890.76 CN25.2@15404.14,4931.3 ; SOM1.JX2-47@5881.89,1535.43 5881.89,1728.35 6029.59,1876.04 v1(9467.81,1876.04) ; v1(13248.03,688.98) 13276.74,660.27 13276.74,516.17 13321.59,471.33 CN22.2@13321.59,469.42
  Bottom Layer w8: CN23.2@4940.16,9488.19 4940.16,9481.1 4980.69,9440.57 4980.69,9185.69 4967.83,9172.82 4967.83,7035.22 4970.47,7032.58 v1(4970.47,4891.73) ; CN21.2@9125.98,9488.19 9183.07,9431.1 9183.07,9202.24 9153.66,9172.82 9153.66,4957.27 9209.14,4901.79 v1(9211.43,4899.49) 9467.81,4643.11 v1(9467.81,1876.04) ; v1(13248.03,688.98) 13248.18,689.12 13248.18,4838.89 v1(13308.77,4899.49) 13348.14,4938.86 13348.14,9172.82 13374.49,9199.17 13374.49,9427.09 13320.47,9481.1 CN24.2@13320.47,9488.19
P63: J4.1 SOM1.JX2-69 | length 3816.3
  Top Layer w8: SOM1.JX2-69@6228.35,1535.43 6228.35,1582.93 6358.01,1712.6 6389.76,1712.6 6417.32,1740.16 9895.28,1740.16 J4.1@9921.26,1714.17
P64: J4.13 SOM1.JX2-74 | length 3890.9
  Top Layer w8: SOM1.JX2-74@6291.34,1362.2 6291.34,1314.7 6291.71,1314.7 6404.3,1202.11 7507.73,1202.11 7638.77,1071.06 7896.72,1071.06 8054.2,1228.54 9806.89,1228.54 J4.13@9921.26,1114.17
P65: J4.2 SOM1.JX2-73 | length 3875
  Top Layer w8: SOM1.JX2-73@6291.34,1535.43 6295.17,1539.26 6295.17,1582.57 6429.13,1716.54 9840.12,1716.54 9895.24,1661.42 9968.5,1661.42 J4.2@10021.26,1714.17
P66: J4.12 SOM1.JX2-76 | length 3958.5
  Top Layer w8: SOM1.JX2-76@6322.83,1362.2 6322.83,1314.7 6417.87,1219.67 7521.29,1219.67 7647.89,1093.07 7887.6,1093.07 8045.08,1250.55 9812.44,1250.55 9897.64,1165.35 9972.44,1165.35 J4.12@10021.26,1214.17
P67: J4.3 SOM1.JX2-75 | length 3721.6
  Top Layer w8: SOM1.JX2-75@6322.83,1535.43 6326.67,1539.26 6326.67,1582.57 6437.01,1692.91 9826.77,1692.91 9893.83,1625.85 9897.15,1625.85 9908.83,1614.17 J4.3@9921.26,1614.17
P68: J4.11 SOM1.JX2-82 | length 3748.9
  Top Layer w8: SOM1.JX2-82@6417.32,1362.2 6417.32,1271.43 6447.07,1241.67 7530.41,1241.67 7657.01,1115.08 7878.49,1115.08 8035.97,1272.56 9862.87,1272.56 J4.11@9921.26,1214.17
P69: J4.4 SOM1.JX2-81 | length 3753.4
  Top Layer w8: SOM1.JX2-81@6417.32,1535.43 6417.32,1584.65 6505.91,1673.23 9791.34,1673.23 9897.64,1566.93 9974.02,1566.93 J4.4@10021.26,1614.17
P70: J4.10 SOM1.JX2-84 | length 3813.9
  Top Layer w8: SOM1.JX2-84@6448.82,1362.2 6448.82,1283.47 6468.6,1263.68 7539.53,1263.68 7666.12,1137.09 7869.37,1137.09 8026.85,1294.57 9876.69,1294.57 9911.42,1259.84 9960.63,1259.84 10014.96,1314.17 J4.10@10021.26,1314.17
P71: J4.5 SOM1.JX2-83 | length 3606.9
  Top Layer w8: SOM1.JX2-83@6448.82,1535.43 6448.82,1582.93 6519.43,1653.54 9772.01,1653.54 9911.38,1514.17 J4.5@9921.26,1514.17
P72: J4.9 SOM1.JX2-88 | length 3588.6
  Top Layer w8: SOM1.JX2-88@6511.81,1362.2 6511.81,1312.99 6545.28,1279.53 7554.8,1279.53 7675.24,1159.09 7860.25,1159.09 8017.73,1316.57 9918.86,1316.57 J4.9@9921.26,1314.17
P73: J4.6 SOM1.JX2-87 | length 3665.2
  Top Layer w8: SOM1.JX2-87@6511.81,1535.43 6512,1535.62 6512,1582.75 6563.11,1633.86 9740.91,1633.86 9906.27,1468.5 9975.59,1468.5 J4.6@10021.26,1514.17
P74: J4.8 SOM1.JX2-90 | length 3677.3
  Top Layer w8: SOM1.JX2-90@6543.3,1362.2 6543.3,1314.7 6558.8,1299.21 7566.24,1299.21 7684.35,1181.1 7851.14,1181.1 8008.62,1338.58 9645.67,1338.58 9661.42,1354.33 9961.42,1354.33 J4.8@10021.26,1414.17
P75: J4.7 SOM1.JX2-89 | length 3521.2
  Top Layer w8: SOM1.JX2-89@6543.31,1535.43 6543.31,1582.93 6574.55,1614.17 9721.26,1614.17 J4.7@9921.26,1414.17
PC104_GND: CN20.29 CN20.30 CN20.31 CN20.32 CN20.81 CN20.82 CN20.83 CN20.84 CN21.29 CN21.30 CN21.31 CN21.32 CN21.81 CN21.82 CN21.83 CN21.84 CN22.29 CN22.30 CN22.31 CN22.32 CN22.81 CN22.82 CN22.83 CN22.84 CN23.29 CN23.30 CN23.31 CN23.32 CN23.81 CN23.82 CN23.83 CN23.84 CN24.29 CN24.30 CN24.31 CN24.32 CN24.81 CN24.82 CN24.83 CN24.84 CN25.29 CN25.30 CN25.31 CN25.32 CN25.81 CN25.82 CN25.83 CN25.84 L2.2 L3.2 L4.2
PG_CARRIER: IC1.9 IC5.1 SOM1.JX2-11 TP3.1 | length 4607.2
  Top Layer w7.99: 2391.73,2568.9 v1(5324.8,2568.9) v1@5329.17,2568.9 ; SOM1.JX2-11@5314.96,1535.43 5314.96,1601.08 5324.8,1610.92 v1(5324.8,1614.17)
  Top Layer w11.81: IC1.9@2007.87,2524.61 v1(2007.87,2549.21)
  Top Layer w15: v1(2391.73,2519.68) 2391.73,2568.9 TP3.1@2391.73,2677.17 ; v1@2392.69,2518.73 2413.41,2498.01 2413.41,2491.32 2417.52,2487.2 IC5.1@2429.72,2487.2
  Bottom Layer w7.99: v1(5324.8,1614.17) v1(5324.8,2568.9)
  Bottom Layer w11.81: v1(2007.87,2549.21) 2362.2,2549.21 v1(2391.73,2519.68)
PG_VS: IC2.9 R9.2 | length 140.9
  Top Layer w15: IC2.9@1275.59,2368.11 1275.59,2279.53 1287.83,2267.28 R9.2@1287.83,2232.28
PWR_EN: CH1.2 SOM1.JX1-5 TP1.1 | length 3263.9
  Top Layer w7.99: CH1.2@3366.14,1962.6 3399.61,1929.13 3631.89,1929.13 ; TP1.1@3631.89,1870.08 3631.89,1929.13 ; v1(5216.54,1958.66) 5187.01,1929.13 3631.89,1929.13 ; v1@5216.54,3190.33 5220.47,3194.27 SOM1.JX1-5@5220.47,3285.43
  Top Layer w15: v1(5216.54,3188.98) v1@5216.54,3190.33
  Bottom Layer w7.99: v1(5216.54,1958.66) v1(5216.54,3188.98)
RS485_01_N: J2.2 U22.6 | length 267.2
  Top Layer w8: J2.2@6731.5,70.87 6731.5,148.82 6756.5,173.82 U22.6@6756.5,327.76
RS485_01_P: J2.1 U22.7 | length 267.2
  Top Layer w8: U22.7@6806.5,327.76 6806.5,173.82 6831.5,148.82 J2.1@6831.5,70.87
RS485_02_N: J1.2 U25.6 | length 267.2
  Top Layer w8: J1.2@6046.26,62.01 6046.26,139.96 6071.26,164.96 U25.6@6071.26,318.9
RS485_02_P: J1.1 U25.7 | length 267.2
  Top Layer w8: U25.7@6121.26,318.9 6121.26,164.96 6146.26,139.96 J1.1@6146.26,62.01
RX_CHN_1: CN20.17 CN21.17 CN22.17 CN23.17 CN24.17 CN25.17 SOM1.JX1-73 | length 36784.6
  Top Layer w8: v1(727.5,5674.03) 729.79,5676.33 735.48,5676.33 736.73,5677.57 v1(4140.91,5677.57) v1(8326.74,5677.57) v1(12521.23,5677.57) 14267.85,5677.57 14271.67,5673.75 v1(15034.91,5673.75) ; CN23.17@4139.17,9588.19 4183.07,9544.29 4183.07,9264.54 4197.7,9249.91 4197.7,9139.91 4180.28,9122.5 v1(4180.28,9066.39) ; SOM1.JX1-73@6291.34,3285.43 6294.65,3288.75 6294.65,3341.9 6446.85,3494.09 7608.27,3494.09 7677.17,3562.99 7913.39,3562.99 8101.92,3374.46 v1(8144.39,3374.46) ; CN21.17@8325,9588.19 8368.9,9544.29 8368.9,9264.54 8383.53,9249.91 8383.53,9139.91 8366.11,9122.5 v1(8366.11,9066.39) ; CN24.17@12519.49,9588.19 12563.39,9544.29 12563.39,9264.54 12578.02,9249.91 12578.02,9139.91 12560.6,9122.5 v1(12560.6,9066.39)
  Bottom Layer w8: CN20.17@251.18,5730.12 295.08,5686.22 574.83,5686.22 589.46,5671.59 655.63,5671.59 658.07,5674.03 v1(727.5,5674.03) ; v1(4140.91,5677.57) 4180.28,5716.94 v1(4180.28,9066.39) ; v1(8144.39,3374.46) 8144.39,4633.03 8144.39,5495.23 v1(8326.74,5677.57) 8366.11,5716.94 v1(8366.11,9066.39) ; CN22.17@12521.59,569.42 12481.86,609.15 12481.86,1417.32 12481.86,5638.2 v1(12521.23,5677.57) 12560.6,5716.94 v1(12560.6,9066.39) ; v1(15034.91,5673.75) 15172.95,5673.75 15187.58,5688.38 15467.33,5688.38 CN25.17@15511.23,5732.28
RX_CHN_2: CN20.57 CN21.57 CN22.57 CN23.57 CN24.57 CN25.57 SOM1.JX2-38 | length 40618.9
  Top Layer w8: v1(669.29,5157.48) 671.59,5155.18 678.54,5155.18 685.75,5147.97 v1(4681.95,5147.97) v1(8867.78,5147.97) v1(13062.26,5147.97) 14267.85,5147.97 14270.01,5150.13 v1(15085.57,5150.13) ; v1(4721.32,9162.53) 4721.32,9245.88 4698.82,9268.38 4698.82,9346.85 CN23.57@4740.16,9388.19 ; SOM1.JX2-38@5724.41,1362.2 5724.41,1185.04 5953.88,955.57 7411.9,955.57 7538.5,828.98 7996.99,828.98 8154.47,986.46 v1(9099.7,986.46) ; v1(8907.15,9162.53) 8907.15,9246.76 8884.65,9269.26 8884.65,9346.85 CN21.57@8925.98,9388.19 ; v1(13101.63,9162.53) 13101.63,9248.18 13079.13,9270.68 13079.13,9346.85 CN24.57@13120.47,9388.19
  Bottom Layer w8: CN20.57@451.18,5129.13 492.52,5170.47 568.3,5170.47 568.81,5169.96 656.81,5169.96 v1(669.29,5157.48) ; v1(4681.95,5147.97) 4721.32,5187.34 v1(4721.32,9162.53) ; v1(8907.15,9162.53) 8907.15,5187.34 v1(8867.78,5147.97) 8867.78,4951.12 9099.7,4719.19 9099.7,4606.08 v1(9099.7,986.46) ; v1(13101.63,9162.53) 13101.63,5187.34 v1(13062.26,5147.97) 13025.72,5111.43 13025.72,634.69 13070.87,589.54 13070.87,420.14 CN22.57@13121.59,369.42 ; v1(15085.57,5150.13) 15159.98,5150.13 15182.48,5172.63 15269.89,5172.63 CN25.57@15311.23,5131.3
RX_CHN_3: SOM1.JX2-62 U22.1 | length 1514.6
  Top Layer w7.99: SOM1.JX2-62@6102.36,1362.2 6102.36,1299.21 6289.37,1112.2 v1(6486.22,1112.2)
  Top Layer w8: U22.1@6856.5,495.67 v1@6884.91,467.25
  Top Layer w15: U22.1@6856.5,495.67 U22.1@6856.5,522.64 ; v1@6884.91,467.25 6888.81,467.25 v1(6889.76,466.3)
  Bottom Layer w7.99: v1(6486.22,1112.2) 6486.22,690.94 6710.87,466.3 v1(6889.76,466.3)
RX_CHN_4: SOM1.JX1-88 U25.1 | length 2832
  Top Layer w7.99: v1(6508.86,3018.01) 6508.86,3109.25 SOM1.JX1-88@6511.81,3112.2
  Top Layer w8: U25.1@6168.41,513.68 v1@6168.41,581.79
  Top Layer w15: U25.1@6167.52,512.8 U25.1@6168.41,513.68 ; v1@6168.41,581.79 v1(6169.29,582.68)
  Bottom Layer w7.99: v1(6169.29,582.68) 6322.83,582.68 6437.01,696.85 6437.01,1820.87 6508.86,1892.72 v1(6508.86,3018.01)
RXD_CHN_1: SOM1.JX2-2 U23.4 | length 8733.5
  Top Layer w8: SOM1.JX2-2@5157.48,1362.2 5157.48,1299.21 5779.53,677.17 v1(6295.28,677.17) ; v1(6334.84,7795.28) U23.4@6334.84,7934.25
  Bottom Layer w8: v1(6295.28,677.17) 6297.34,679.23 6297.34,7754.04 6336.71,7793.41 v1(6334.84,7795.28)
RXD_CHN_2: SOM1.JX2-93 U24.4 | length 20938.6
  Top Layer w7.99: v1@6659.9,2213.91 v1(6660.56,2214.57) ; v1@6660.56,2213.91 v1@6661.22,2214.57 ; v1@6660.56,2216.53 v1(13594.49,2216.54)
  Top Layer w8: U24.4@6023.62,7933.07 6023.62,7794.09 6258.66,7559.06 v1(13618.11,7559.06)
  Top Layer w15: SOM1.JX2-93@6606.3,1535.43 6608.8,1532.93 6608.8,1483.11 6614.17,1477.73 v1(6614.17,1476.38)
  Bottom Layer w7.99: v1(13594.49,2216.54) 13606.3,2228.35 13606.3,2858.27
  Bottom Layer w8: 13606.3,2858.27 13606.3,5213.42 13618.11,5225.23 v1(13618.11,7559.06)
  Bottom Layer w11: v1(6614.17,1476.38) 6614.17,1566.93 6660.56,1613.32 v1(6660.56,2214.57)
SCL_CHN_1: CN20.43 CN21.43 CN22.43 CN23.43 CN24.43 CN25.43 SOM1.JX2-7 SOM1.JX2-68 | length 38354.7
  Top Layer w8: v1(708.66,6978.35) 1770.26,6978.35 1774.23,6974.38 v1(2838.12,6974.38) v1(7023.95,6974.38) v1(11218.44,6974.38) 15034.26,6974.38 v1(15036.42,6976.54) ; CN23.43@2840.16,9588.19 2883.07,9545.28 2883.07,9264.54 2894.91,9252.7 2894.91,9131 2877.49,9113.59 v1(2877.49,9057.48) ; SOM1.JX2-7@5251.97,1535.43 5257.97,1541.43 5257.97,1645.76 5730.44,2118.24 v1(6856.08,2118.24) ; SOM1.JX2-68@6196.85,1362.2 6196.85,1313 6352.36,1157.48 6555.12,1157.48 6610.24,1102.36 6846.46,1102.36 v1(6858.27,1114.17) ; CN21.43@7025.98,9588.19 7068.9,9545.28 7068.9,9264.54 7080.74,9252.7 7080.74,9131 7063.32,9113.59 v1(7063.32,9057.48) ; CN24.43@11220.47,9588.19 11263.39,9545.28 11263.39,9264.54 11275.23,9252.7 11275.23,9131 11257.81,9113.59 v1(11257.81,9057.48)
  Bottom Layer w8: CN20.43@251.18,7029.13 294.09,6986.22 574.83,6986.22 582.7,6978.35 v1(708.66,6978.35) ; v1(2838.12,6974.38) 2877.49,7013.75 v1(2877.49,9057.48) ; v1(6856.08,2118.24) 6856.08,6806.51 v1(7023.95,6974.38) 7063.32,7013.75 v1(7063.32,9057.48) ; CN22.43@11221.59,569.42 11190.75,600.26 11190.75,1417.32 11190.75,6946.69 v1(11218.44,6974.38) 11257.81,7013.75 v1(11257.81,9057.48) ; v1(15036.42,6976.54) 15048.08,6988.2 15468.13,6988.2 CN25.43@15511.23,7031.3
  Bottom Layer w11: v1(6858.27,1114.17) v1@6858.27,2118.24
SCL_CHN_2: CN20.103 CN21.103 CN22.103 CN23.103 CN24.103 CN25.103 SOM1.JX2-4 SOM1.JX2-70 | length 37381.7
  Top Layer w8: v1(676.84,7477.84) 696.56,7497.56 v1(2353.69,7497.56) v1(6524.12,7497.56) 6524.87,7496.81 10692.16,7496.81 v1(10692.91,7496.06) 10694.41,7497.56 15068.01,7497.56 15084.49,7481.08 15084.49,7478.92 v1(15085.57,7480) ; v1(2377.66,9176.33) 2377.66,9325.69 CN23.103@2440.16,9388.19 ; SOM1.JX2-4@5188.98,1362.2 5191.01,1360.17 5191.01,1308.99 5783.46,716.54 v1(6720.47,716.54) ; SOM1.JX2-70@6228.34,1362.2 6228.34,1314.7 6361.95,1181.1 v1(6722.44,1181.1) ; v2(6496.06,4460.63) v2(6722.44,4460.63) ; v1(6563.49,9176.33) 6563.49,9325.69 CN21.103@6625.98,9388.19 ; v1(10757.98,9176.33) 10757.98,9325.69 CN24.103@10820.47,9388.19
  Bottom Layer w8: CN20.103@451.18,7429.13 499.88,7477.84 v1(676.84,7477.84) ; v1(2353.69,7497.56) 2377.66,7521.54 2377.66,7536.93 v1(2377.66,9176.33) ; v2(6496.06,4460.63) 6496.06,7469.51 v1(6524.12,7497.56) 6563.49,7536.93 v1(6563.49,9176.33) ; v1(6720.47,716.54) 6721.46,717.52 6721.46,1180.12 v1(6722.44,1181.1) v2(6722.44,4460.63) ; v1(10757.98,9176.33) 10757.98,7561.13 v1(10692.91,7496.06) 10692.91,7455.35 10709.7,7438.56 10795.28,7352.98 10795.28,700.79 10755.91,661.42 10755.91,435.1 CN22.103@10821.59,369.42 ; v1(15085.57,7480) 15262.53,7480 CN25.103@15311.23,7431.3
SCL_CHN_3: SOM1.JX2-49 U1.4 U4.4 U7.2 U7.4 U9.4 U12.4 U13.4 U18.4 U19.1 | length 24792.4
  Top Layer w7.99: U7.4@609.06,8490.35 860.04,8490.35 v3(905.51,8444.88) ; U4.4@609.06,8943.11 741.93,8943.11 v3(905.51,8779.53) ; U1.4@610.24,9399.61 613.98,9395.87 781.3,9395.87 v3(905.51,9271.65) ; U9.4@620.77,8039.47 v3@903.64,8039.47 ; U18.4@1337.4,8581.3 1348.72,8581.3 2021.46,8581.3 v1@2299.34,8303.42 ; U12.4@1337.4,9051.38 2021.46,9051.38 v1@2299.33,8773.5 ; U13.4@1338.58,8149.61 2022.64,8149.61 v1@2300.52,7871.73
  Top Layer w8: U7.4@600.39,8494.09 573.43,8494.09 542.52,8463.19 542.52,8425 581.69,8385.83 U7.2@620.08,8385.83 ; v1(909.45,4334.65) v1(2312.99,4334.65) ; U18.4@1348.72,8581.3 U18.4@1356.53,8573.49 ; v1@2314.35,4334.65 v1(7090.55,4334.65) 7321.46,4565.55 U19.1@7590.55,4565.55 ; SOM1.JX2-49@5913.39,1535.43 5913.39,1710.63 6058.84,1856.08 7064.14,1856.08 v1(7065.19,1855.04)
  Top Layer w15: U9.4@618.9,8037.6 U9.4@620.77,8039.47 ; v3@903.64,8039.47 v3(905.51,8041.34)
  Bottom Layer w7.99: v3(905.51,9271.65) v3(905.51,8779.53) v3(905.51,8444.88) v3(905.51,8041.34) 905.51,6227.84 909.45,6223.9 v1(909.45,4334.65) ; v1(2312.99,4334.65) 2312.99,4625.98
  Bottom Layer w8: v1@2303.15,8769.68 2303.15,7421.26 2312.99,7411.42 2312.99,4625.98 ; v1(7065.19,1855.04) 7090.55,1880.4 v1(7090.55,4334.65)
  Bottom Layer w11: v1(7065.19,1855.04) v1@7065.71,1855.56
  other v1: 2304.62,7866.17 2303.44,8297.86 2303.44,8767.94
SDA_CHN_1: CN20.41 CN21.41 CN22.41 CN23.41 CN24.41 CN25.41 SOM1.JX2-8 SOM1.JX2-63 | length 39450.1
  Top Layer w7.99: SOM1.JX2-8@5251.97,1362.2 5251.97,1303.15 5799.21,755.91 v1(6889.76,755.91)
  Top Layer w8: v1(718.5,6879.92) 2929.34,6879.92 2936.98,6872.28 v1(2940.23,6872.28) v1(7126.05,6872.28) v1(11320.54,6872.28) 15032.91,6872.28 v1(15035.07,6874.44) ; CN23.41@2940.16,9588.19 2983.07,9545.28 2983.07,9264.54 2997.01,9250.6 2997.01,9133.16 2979.6,9115.74 v1(2979.6,9059.64) ; SOM1.JX2-63@6133.86,1535.43 6133.86,1582.93 6312.74,1761.81 v1(6358.27,1761.81) ; CN21.41@7125.98,9588.19 7168.9,9545.28 7168.9,9264.54 7182.84,9250.6 7182.84,9133.16 7165.42,9115.74 v1(7165.42,9059.64) ; CN24.41@11320.47,9588.19 11363.39,9545.28 11363.39,9264.54 11377.33,9250.6 11377.33,9133.16 11359.91,9115.74 v1(11359.91,9059.64)
  Bottom Layer w8: CN20.41@251.18,6929.13 294.09,6886.22 574.83,6886.22 588.77,6872.28 648.19,6872.28 655.84,6879.92 v1(718.5,6879.92) ; v1(2940.23,6872.28) 2979.6,6911.65 v1(2979.6,9059.64) ; v1(6351.63,755.91) 6351.63,824.76 6320.01,856.38 6320.01,1514.55 6358.27,1552.81 v1(6358.27,1761.81) ; v1(6889.76,755.91) 6889.77,6635.99 v1(7126.05,6872.28) 7165.42,6911.65 v1(7165.42,9059.64) ; CN22.41@11321.59,569.42 11290.75,600.26 11290.75,691.2 11290.59,691.36 11292.85,693.61 11292.85,1417.32 11292.85,6844.58 v1(11320.54,6872.28) 11359.91,6911.65 v1(11359.91,9059.64) ; v1(15035.07,6874.44) 15050.38,6889.75 15469.68,6889.75 CN25.41@15511.23,6931.3
SDA_CHN_2: CN20.101 CN21.101 CN22.101 CN23.101 CN24.101 CN25.101 SOM1.JX2-1 SOM1.JX2-67 | length 36074
  Top Layer w7.99: SOM1.JX2-1@5157.48,1535.43 5157.48,1643.7 5700.21,2186.43 v1(6629.92,2186.43)
  Top Layer w8: v1(676.84,7377.84) 678.35,7377.84 693.76,7393.25 v1(2448.84,7393.25) v1(6634.67,7393.25) 6634.89,7393.48 10842.3,7393.48 v1(10842.52,7393.7) 15068.62,7393.7 15082.33,7380 v1(15085.57,7380) ; v1(2483.89,9171.5) 2483.89,9331.92 CN23.101@2540.16,9388.19 ; SOM1.JX2-67@6196.85,1535.43 6198.89,1537.47 6198.89,1592.59 6342.52,1736.22 6377.95,1736.22 6405.51,1763.78 v1(6629.92,1763.78) ; v1(6669.72,9171.5) 6669.72,9331.92 CN21.101@6725.98,9388.19 ; v1(10864.21,9171.5) 10864.21,9331.92 CN24.101@10920.47,9388.19
  Bottom Layer w8: CN20.101@451.18,7329.13 499.88,7377.84 v1(676.84,7377.84) ; v1(2448.84,7393.25) 2488.21,7432.62 2488.21,7475.99 2483.89,7480.31 v1(2483.89,9171.5) ; v1(6629.92,1763.78) v1(6629.92,2186.43) 6629.92,7385.26 6634.67,7390.01 v1(6634.67,7393.25) 6674.04,7432.62 6674.04,7475.99 6669.72,7480.31 v1(6669.72,9171.5) ; v1(10864.21,9171.5) 10866.5,9169.2 10866.5,9162.84 10868.53,9160.81 10868.53,7475.99 10868.53,7419.71 v1(10842.52,7393.7) 10842.52,7390.45 10837.26,7385.19 10837.26,660.59 10842.52,655.33 10842.52,626.66 10865.62,603.56 10865.62,468.06 10921.59,412.09 CN22.101@10921.59,369.42 ; v1(15085.57,7380) 15262.53,7380 CN25.101@15311.23,7331.3
SDA_CHN_3: SOM1.JX2-50 U1.3 U4.3 U7.3 U9.2 U9.3 U12.3 U13.3 U18.2 U18.3 U19.6 | length 25010.7
  Top Layer w7.99: U7.3@609.06,8440.35 818.42,8440.35 v3@843.42,8415.35 ; U4.3@609.06,8893.11 703.35,8893.11 v3(846.46,8750) ; U1.3@610.24,9349.61 613.98,9345.87 742.72,9345.87 v3(846.46,9242.13) ; U9.2@621.16,7935.33 v3@706.4,7935.33 ; U18.3@1337.4,8531.3 2020.78,8531.3 v1(2254.22,8297.86) ; U12.3@1337.4,9001.38 2020.78,9001.38 v1(2254.22,8767.94) ; U13.3@1338.58,8099.61 2021.97,8099.61 v1(2255.41,7866.17)
  Top Layer w8: U9.2@618.9,7937.6 U9.3@618.9,7987.6 ; v1(846.46,4389.76) 895.67,4389.76 v1(2253.94,4389.76) v1(7027.56,4389.76) 7261.22,4623.43 U19.6@7590.55,4623.43 ; U18.2@1337.4,8481.3 U18.3@1337.4,8531.3 U18.3@1344,8537.9 ; SOM1.JX2-50@5913.38,1362.2 5913.38,1153.55 6023.33,1043.6 v1(7040.65,1043.6)
  Top Layer w15: U9.2@618.9,7937.6 U9.2@621.16,7935.33 ; v3@706.4,7935.33 v3(708.66,7933.07) ; v3@843.42,8415.35 v3(846.46,8415.35)
  Bottom Layer w7.99: v1(846.46,4389.76) 846.46,7933.07 v3(846.46,8415.35) v3(846.46,8750) v3(846.46,9242.13) ; v1(2253.94,4389.76) 2253.94,4488.19
  Bottom Layer w8: v3(708.66,7933.07) 846.46,7933.07 ; 2253.94,4488.19 v1@2253.94,8769.68 ; v1(7027.56,4389.76) 7027.56,1056.69 v1(7040.65,1043.6)